# Altium PCB PCB_moteur.PcbDoc
Units mm, origin at the board's own origin, x right, y up, seen from the top; angles counter-clockwise.
Board outline 55 x 50 mm, 4 copper layers (Top Layer, Mid Layer 1, Mid Layer 2, Bottom Layer), stack 1.65 mm thick; 14 components, 2 nets, 38 pads, 38 vias.
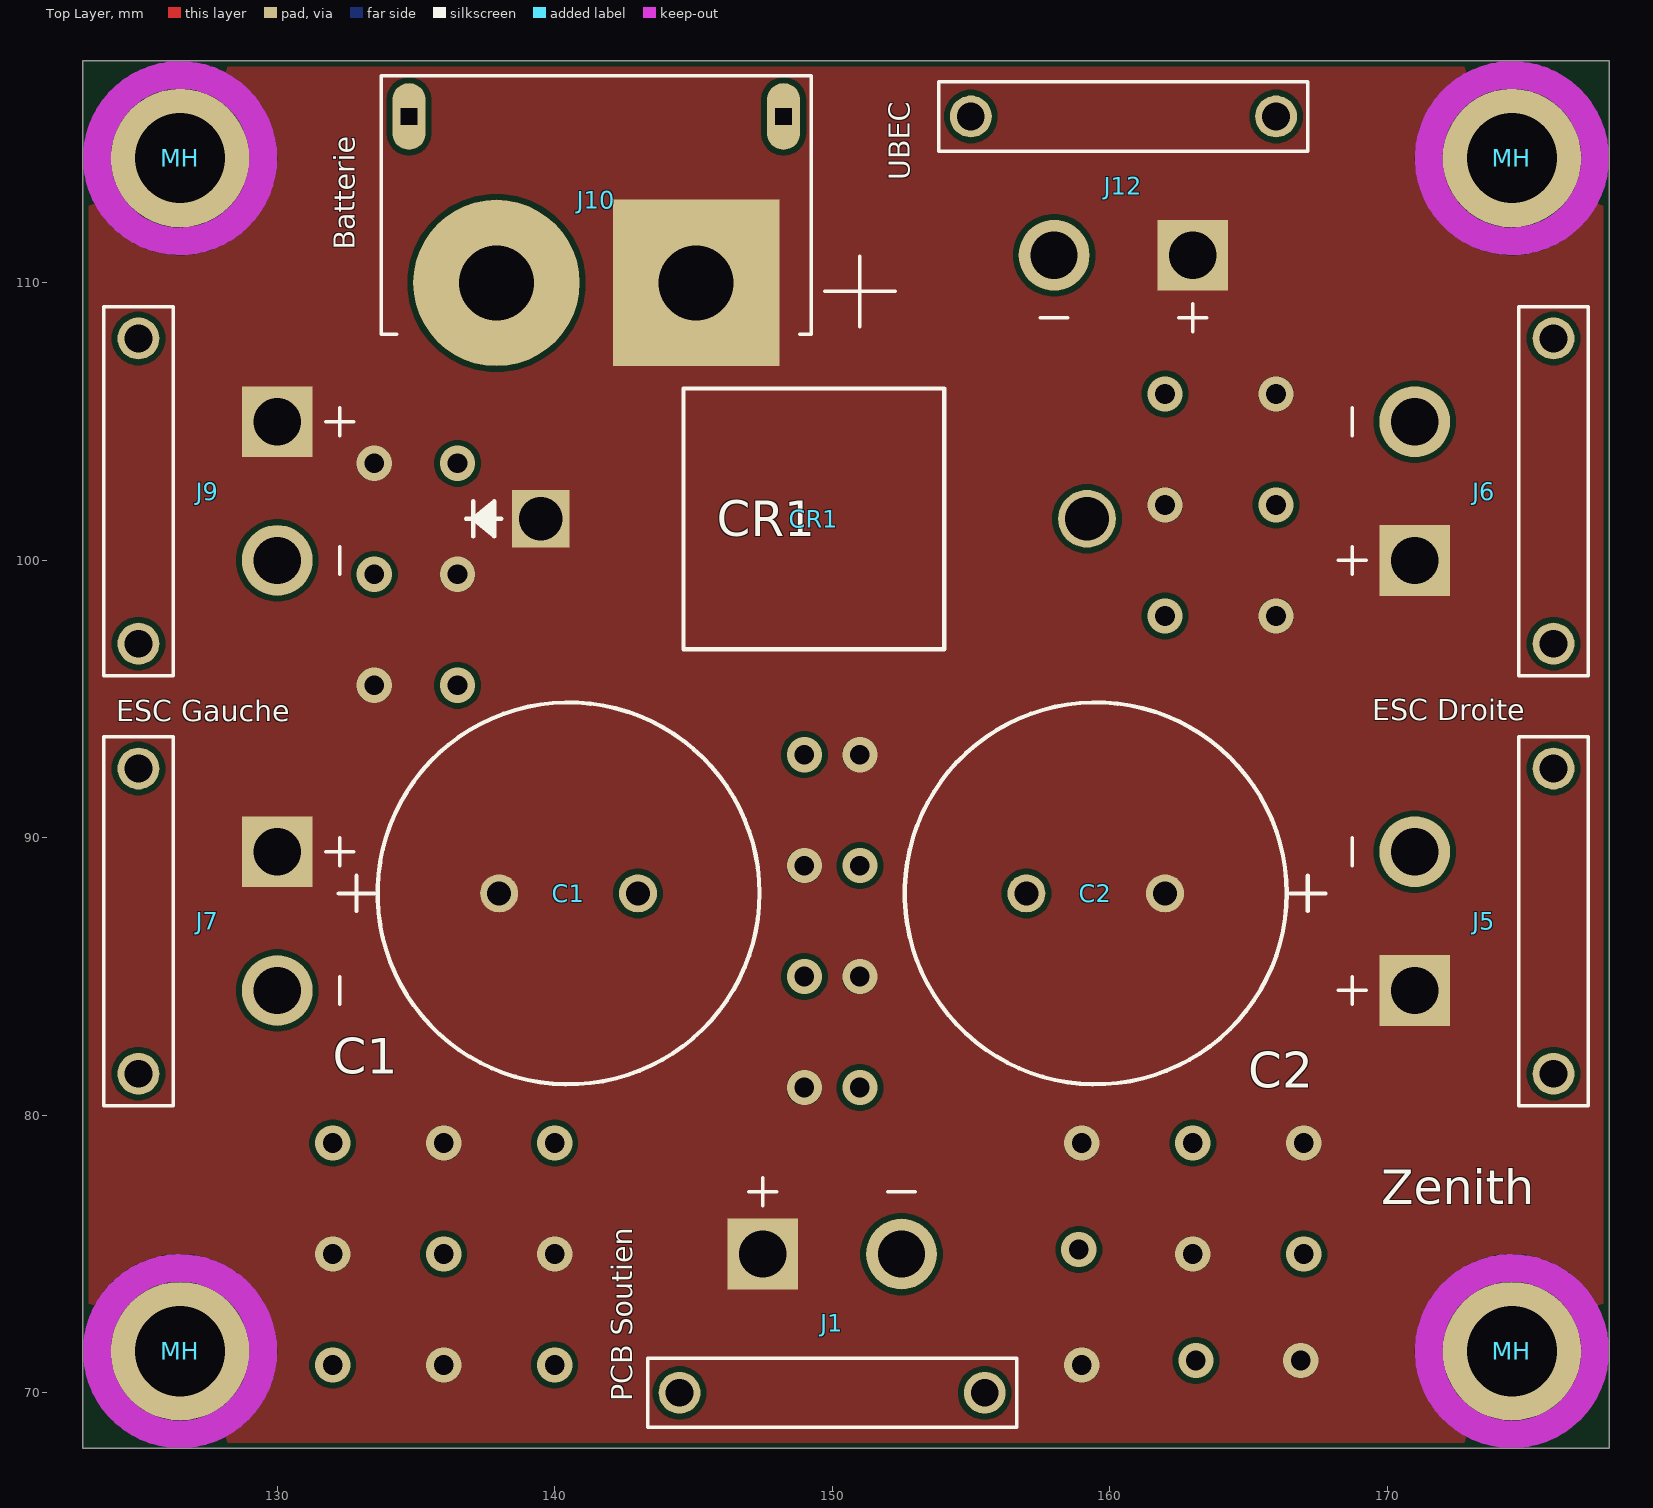
[diagram p0: Top Layer view]
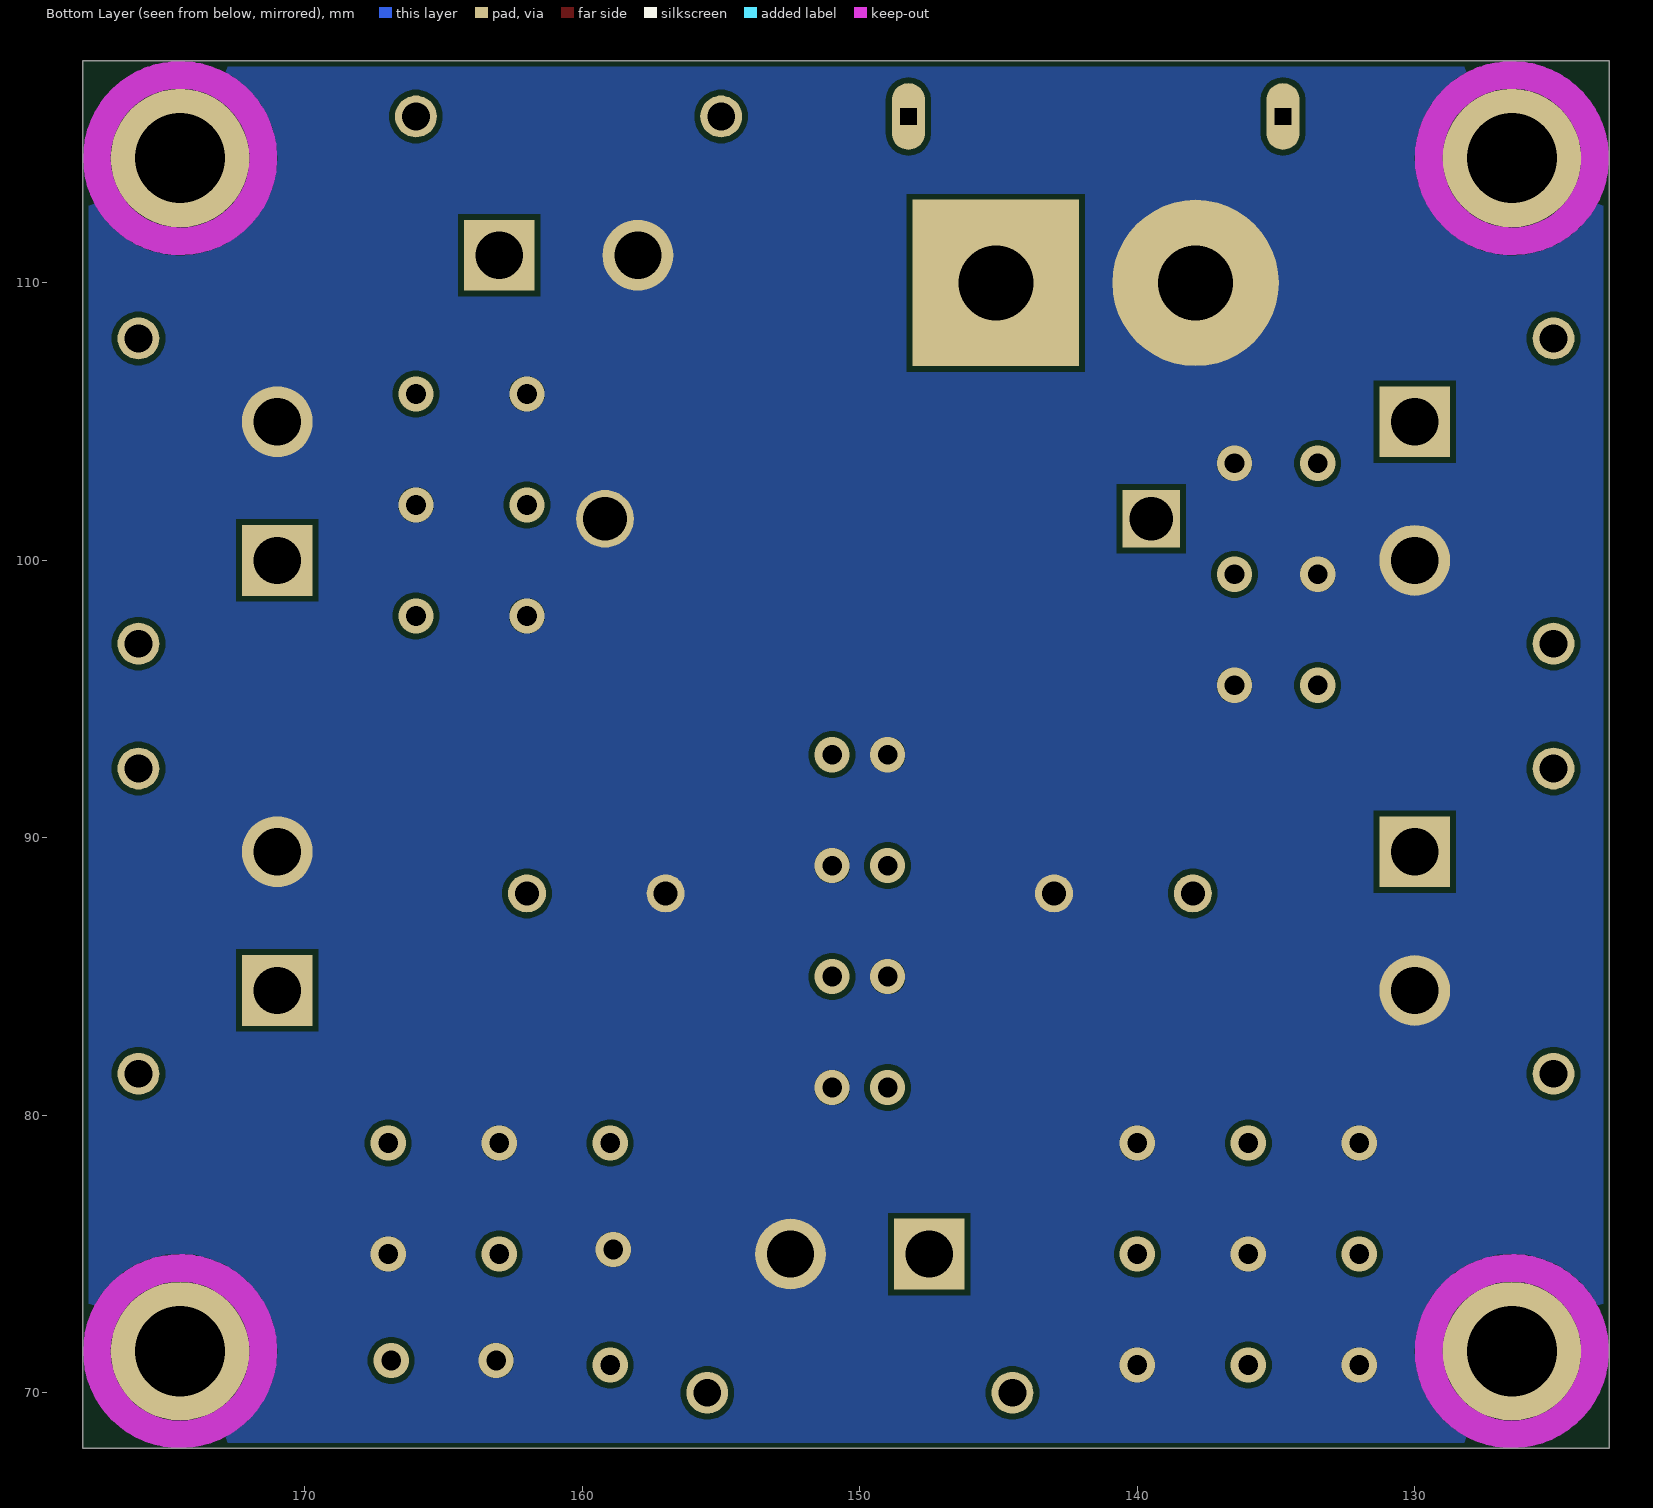
[diagram p1: Bottom Layer view, seen from below]
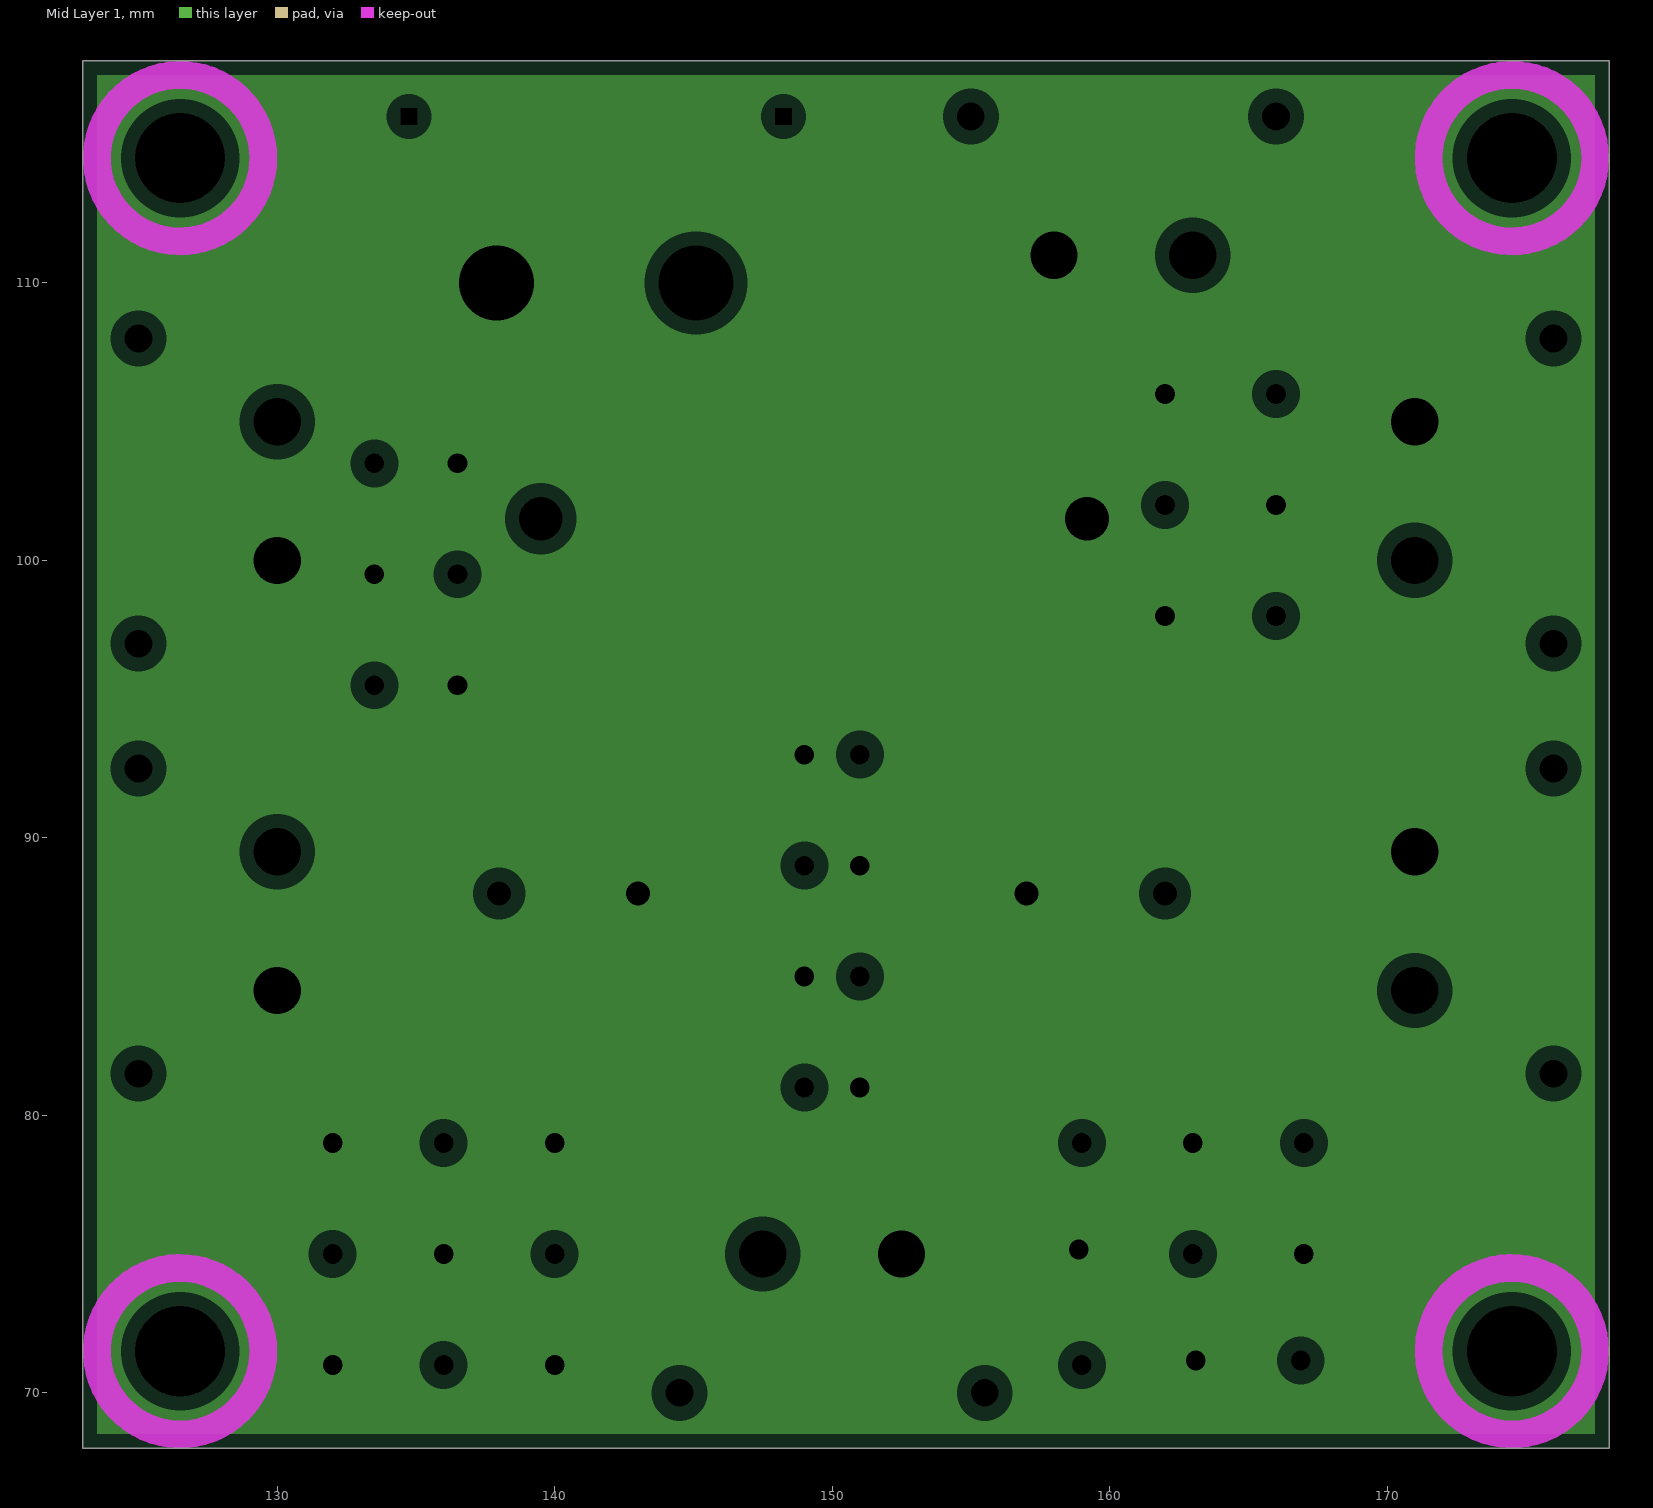
[diagram p2: Mid Layer 1, clearances drawn from the general rule]
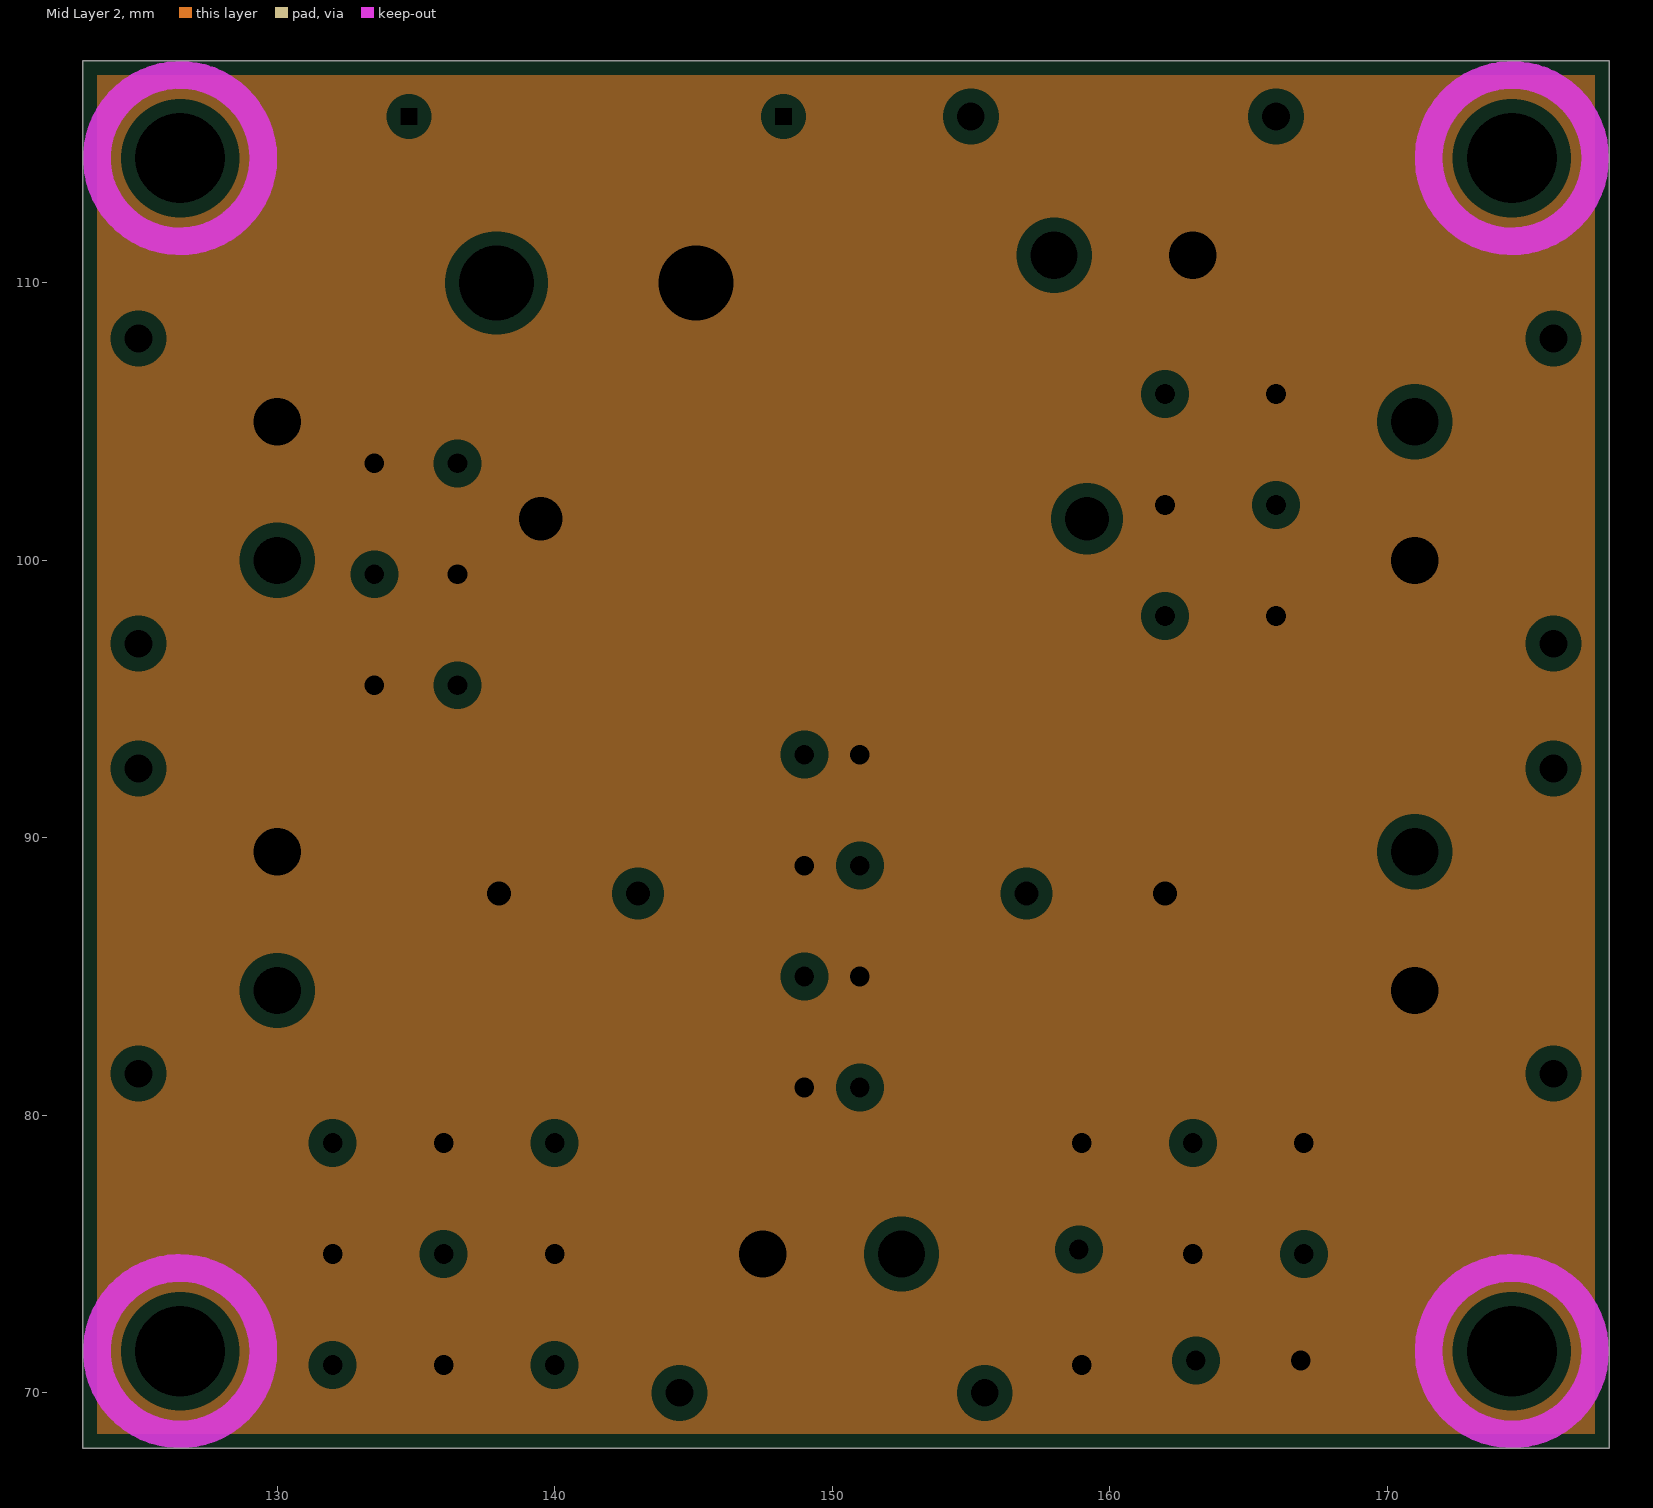
[diagram p3: Mid Layer 2, clearances drawn from the general rule]
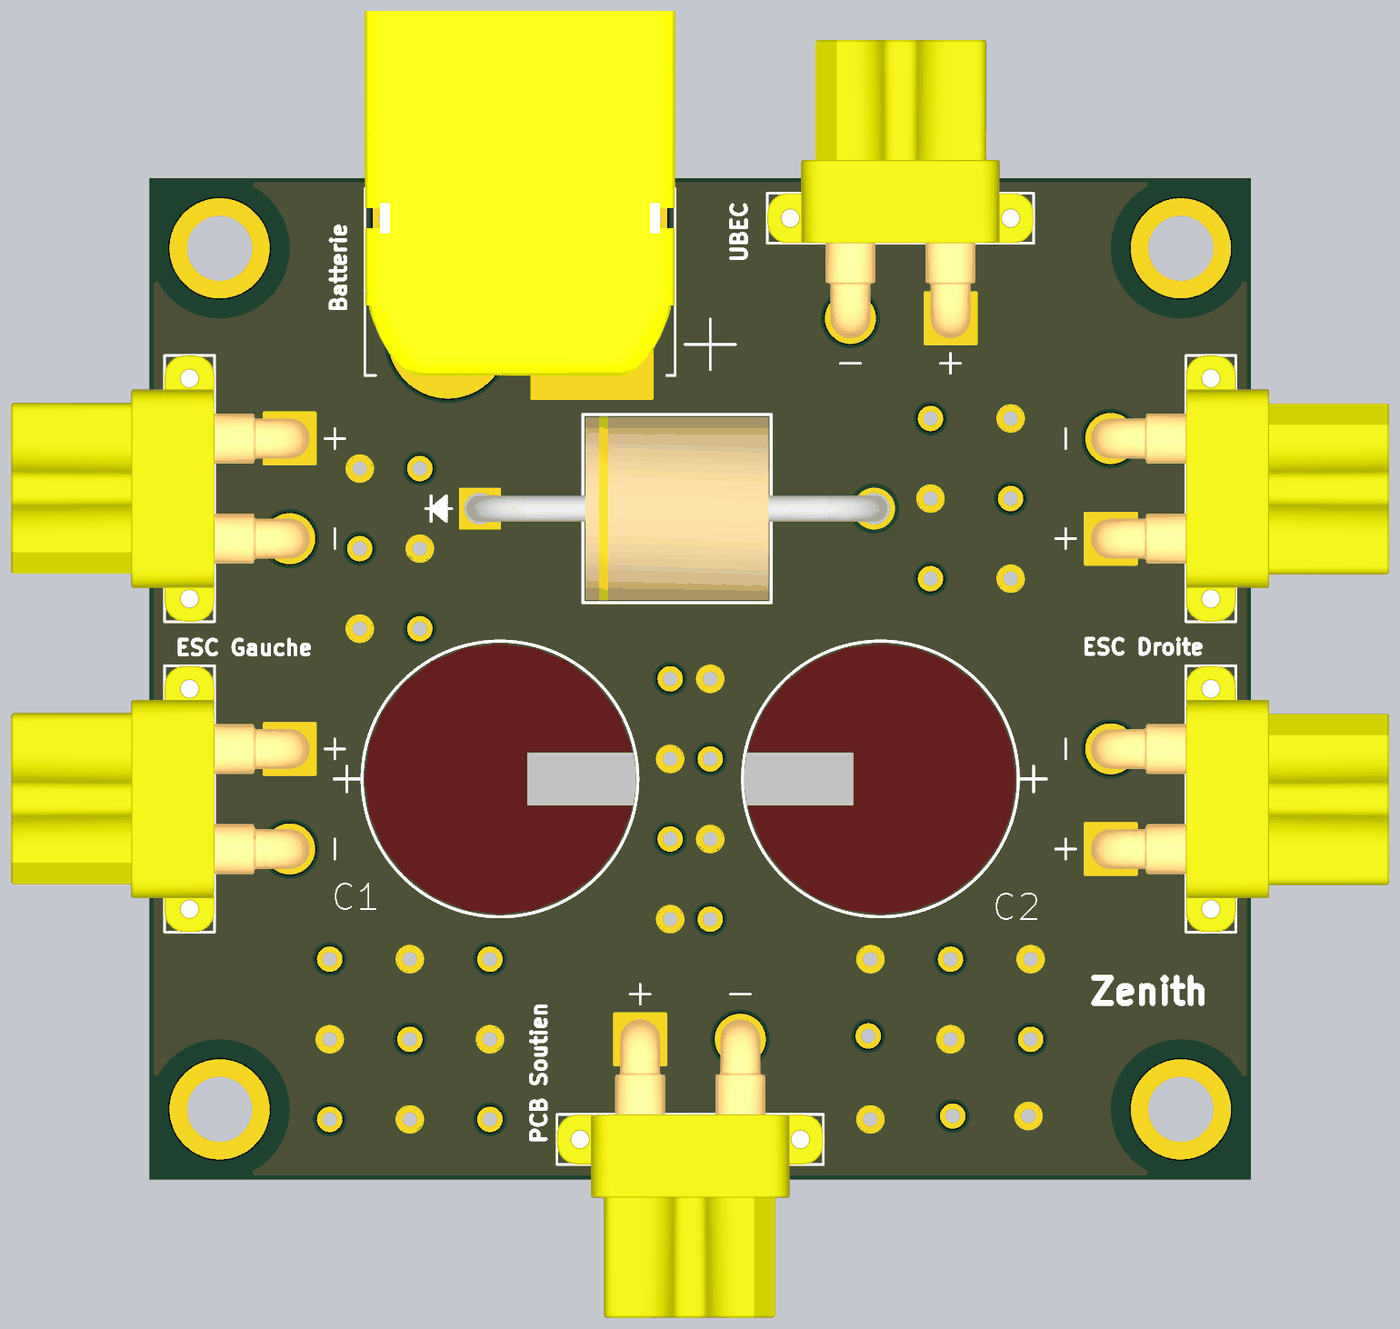
[diagram p4: 3D render of the assembled board from above, using the file's embedded part models]

## Layer stack, top to bottom
Top Solder: solder mask 0.0127, Solder Resist, Dk 3.8
Top Layer: signal copper 0.075
Dielectric 1: prepreg 0.1, 2313, Dk 4.05
Mid Layer 1: plane copper 0.0175, net GND
Core: core 1.265, FR-4, Dk 4.5
Mid Layer 2: plane copper 0.0175, net NetC1_1
Dielectric 2: prepreg 0.1, 2313, Dk 4.05
Bottom Layer: signal copper 0.075
Bottom Solder: solder mask 0.0127, Solder Resist, Dk 3.8

## Board outline
123,68 178,68 178,118 123,118

## Design rules (kind name [scope] priority, off if disabled: settings)
BoardOutlineClearance [All] p1: gap=0.2 ignorepadtopadclearanceinfootprint=FALSE
Clearance ClearanceMidLayer1 [OnLayer('Mid Layer 1') Or IsVia Or IsThruPin vs OnLayer('Mid Layer 1')] p1: gap=0.102 ignorepadtopadclearanceinfootprint=FALSE except(0.127: Arc-Via Track-Via SMDPad-Via THPad-Via Via-Via Via-Fill Via-Poly Via-Region Via-Text; 0.25: Arc-Hole Track-Hole SMDPad-Hole THPad-Hole Via-Hole Fill-Hole Poly-Hole Region-Hole Text-Hole)
Clearance ClearanceTopLayer [OnLayer('Top Layer') Or IsVia Or IsThruPin vs OnLayer('Top Layer') Or IsVia Or IsThruPin] p2: gap=0.203 ignorepadtopadclearanceinfootprint=FALSE except(0.25: Arc-Hole Track-Hole SMDPad-Hole THPad-Hole Via-Hole Fill-Hole Poly-Hole Region-Hole Text-Hole)
Clearance ClearanceBottomLayer [OnLayer('Bottom Layer') Or IsVia Or IsThruPin vs OnLayer('Bottom Layer') Or IsVia Or IsThruPin] p3: gap=0.203 ignorepadtopadclearanceinfootprint=FALSE except(0.25: Arc-Hole Track-Hole SMDPad-Hole THPad-Hole Via-Hole Fill-Hole Poly-Hole Region-Hole Text-Hole)
Clearance ClearanceMidLayer2 [OnLayer('Mid Layer 2') Or IsVia Or IsThruPin vs OnLayer('Mid Layer 2')] p4: gap=0.102 ignorepadtopadclearanceinfootprint=FALSE except(0.127: Arc-Via Track-Via SMDPad-Via THPad-Via Via-Via Via-Fill Via-Poly Via-Region Via-Text; 0.25: Arc-Hole Track-Hole SMDPad-Hole THPad-Hole Via-Hole Fill-Hole Poly-Hole Region-Hole Text-Hole)
ComponentClearance [All] p1: gap=0.102 collisioncheckmode=3 verticalgap=0.102 showdistances=TRUE
DiffPairsRouting [All] p1: maxlimit=0.203 minlimit=0.203 mostfreqgap=0.203 toplayer_minwidth=0.203 toplayer_maxwidth=1816.048 toplayer_prefwidth=0.203 bottomlayer_minwidth=0.203 bottomlayer_maxwidth=1816.048 bottomlayer_prefwidth=0.203 maxuncoupledlength=12.7
Height [All] p1: minheight=0 maxheight=1816.048 prefheight=12.7
HoleSize [All] p1: absolutevalues=TRUE maxlimit=6.3 minlimit=0.2 maxpercent=80.000 minpercent=20.000
HoleToHoleClearance [All] p1: gap=0.25 allowstackedmicrovias=FALSE
MinimumAnnularRing [All] p1: minimumring=0.076
MinimumSolderMaskSliver [All] p1: minsoldermaskwidth=0
PlaneClearance PlaneClearanceMidLayer1 [OnLayer('Mid Layer 1')] p1: clearance=0.102
PlaneClearance PlaneClearanceMidLayer2 [OnLayer('Mid Layer 2')] p2: clearance=0.102
PlaneClearance PlaneClearanceTopLayer [OnLayer('Top Layer')] p3: clearance=0.203
PlaneClearance PlaneClearanceBottomLayer [OnLayer('Bottom Layer')] p4: clearance=0.203
PlaneConnect PlaneConnectPowerPads [InPadClass('PowerPads')] p1: planeconnectstyle=Direct reliefexpansion=0.508 reliefentries=4 reliefconductorwidth=0.254 reliefairgap=0.254
PlaneConnect PlaneConnectTopLayer [OnLayer('Top Layer')] p2: pad.planeconnectstyle=Relief pad.reliefexpansion=0.3 pad.reliefentries=4 pad.reliefconductorwidth=0.203 pad.reliefairgap=0.203 via.planeconnectstyle=Direct via.reliefexpansion=0.3 via.reliefentries=4 via.reliefconductorwidth=0.127 via.reliefairgap=0.127
PlaneConnect PlaneConnectBottomLayer [OnLayer('Bottom Layer')] p3: pad.planeconnectstyle=Relief pad.reliefexpansion=0.3 pad.reliefentries=4 pad.reliefconductorwidth=0.203 pad.reliefairgap=0.203 via.planeconnectstyle=Direct via.reliefexpansion=0.3 via.reliefentries=4 via.reliefconductorwidth=0.127 via.reliefairgap=0.127
PlaneConnect PlaneConnectMidLayer1 [OnLayer('Mid Layer 1')] p4: pad.planeconnectstyle=Relief pad.reliefexpansion=0.3 pad.reliefentries=4 pad.reliefconductorwidth=0.102 pad.reliefairgap=0.102 via.planeconnectstyle=Direct via.reliefexpansion=0.3 via.reliefentries=4 via.reliefconductorwidth=0.127 via.reliefairgap=0.127
PlaneConnect PlaneConnectMidLayer2 [OnLayer('Mid Layer 2')] p5: pad.planeconnectstyle=Relief pad.reliefexpansion=0.3 pad.reliefentries=4 pad.reliefconductorwidth=0.102 pad.reliefairgap=0.102 via.planeconnectstyle=Direct via.reliefexpansion=0.3 via.reliefentries=4 via.reliefconductorwidth=0.127 via.reliefairgap=0.127
PolygonConnect PolygonConnectPowerPads [All vs (InPadClass('PowerPads'))] p1: connectstyle=Direct reliefconductorwidth=0.254 reliefentries=4 polygonreliefangle="90 Angle" airgapwidth=0.254
PolygonConnect PolygonConnectMidLayer1 [OnLayer('Mid Layer 1') vs OnLayer('Mid Layer 1')] p2: thpad.connectstyle=Relief thpad.reliefconductorwidth=0.102 thpad.reliefentries=4 thpad.polygonreliefangle="90 Angle" thpad.airgapwidth=0.102 smdpad.connectstyle=Relief smdpad.reliefconductorwidth=0.102 smdpad.reliefentries=4 smdpad.polygonreliefangle="90 Angle" smdpad.airgapwidth=0.102 via.connectstyle=Direct via.reliefconductorwidth=0.127 via.reliefentries=4 via.polygonreliefangle="90 Angle" via.airgapwidth=0.127
PolygonConnect PolygonConnectMidLayer2 [OnLayer('Mid Layer 2') vs OnLayer('Mid Layer 2')] p3: thpad.connectstyle=Relief thpad.reliefconductorwidth=0.102 thpad.reliefentries=4 thpad.polygonreliefangle="90 Angle" thpad.airgapwidth=0.102 smdpad.connectstyle=Relief smdpad.reliefconductorwidth=0.102 smdpad.reliefentries=4 smdpad.polygonreliefangle="90 Angle" smdpad.airgapwidth=0.102 via.connectstyle=Direct via.reliefconductorwidth=0.127 via.reliefentries=4 via.polygonreliefangle="90 Angle" via.airgapwidth=0.127
PolygonConnect PolygonConnectTopLayer [OnLayer('Top Layer') vs OnLayer('Top Layer')] p4: thpad.connectstyle=Relief thpad.reliefconductorwidth=0.203 thpad.reliefentries=4 thpad.polygonreliefangle="90 Angle" thpad.airgapwidth=0.203 smdpad.connectstyle=Relief smdpad.reliefconductorwidth=0.203 smdpad.reliefentries=4 smdpad.polygonreliefangle="90 Angle" smdpad.airgapwidth=0.203 via.connectstyle=Direct via.reliefconductorwidth=0.127 via.reliefentries=4 via.polygonreliefangle="90 Angle" via.airgapwidth=0.127
PolygonConnect PolygonConnectBottomLayer [OnLayer('Bottom Layer') vs OnLayer('Bottom Layer')] p5: thpad.connectstyle=Relief thpad.reliefconductorwidth=0.203 thpad.reliefentries=4 thpad.polygonreliefangle="90 Angle" thpad.airgapwidth=0.203 smdpad.connectstyle=Relief smdpad.reliefconductorwidth=0.203 smdpad.reliefentries=4 smdpad.polygonreliefangle="90 Angle" smdpad.airgapwidth=0.203 via.connectstyle=Direct via.reliefconductorwidth=0.127 via.reliefentries=4 via.polygonreliefangle="90 Angle" via.airgapwidth=0.127
RoutingVias [All] p1: holewidth=0.2 width=0.45 viastyle="Through Hole" minholewidth=0.2 minwidth=0.45 maxholewidth=6.3 maxwidth=6.55
SilkToSilkClearance [All] p1: silktosilkclearance=0
SilkToSolderMaskClearance [IsPad] p1: minsilkscreentomaskgap=0.102 clearancetoexposedcopper=TRUE
SolderMaskExpansion [All] p1: expansion=0.075 istentingtop=FALSE
Width [All] p1: maxlimit=1816.048 minlimit=0.203 preferedwidth=0.203 minimp=50.000000 maximp=50.000000 favimp=50.000000
20 further rules are at their usual default settings.

## Classes and differential pairs
pad class PowerPads: C1-1 C1-2 C2-1 C2-2 CR1-1 CR1-2 J1-N J1-P J1-S1 J1-S2 J5-N J5-P J5-S1 J5-S2 J6-N J6-P J6-S1 J6-S2 J7-N J7-P J7-S1 J7-S2 J9-N J9-P J9-S1 J9-S2 J10-1 J10-2 J10-S1 J10-S2 J12-N J12-P J12-S1 J12-S2 MH-MH
component class SCHEM_MOTEUR_PDB_OFA: C1 C2 CR1 J1 J5 J6 J7 J9 J10 J12

## Components (designator, comment, footprint, x,y, rotation, side; value= is the part's Value field where it differs from the comment)
C1 "1000uF 35V" CAP_RX_12P5X25_RUB 138,88 r0 top
C2 "1000uF 35V" CAP_RX_12P5X25_RUB 162,88 r180 top
CR1 "5KP30A" DIODE_P600_VIS 139.5,101.5 r0 top
J1 "XT30PW-F" AMASS_XT30PW-F 150,70 r180 top
J5 "XT30PW-F" AMASS_XT30PW-F 176,87 r270 top
J6 "XT30PW-F" AMASS_XT30PW-F 176,102.5 r270 top
J7 "XT30PW-F" AMASS_XT30PW-F 125,87 r90 top
J9 "XT30PW-F" AMASS_XT30PW-F 125,102.5 r90 top
J10 "XT60PW-M" AMASS_XT60PW-M 141.5,116 r0 top
J12 "XT30PW-F" AMASS_XT30PW-F 160.5,116 r0 top
MH "Comment" "MH - Footprint" 174.5,71.5 r0 top
MH "Comment" "MH - Footprint" 126.5,71.5 r0 top
MH "Comment" "MH - Footprint" 126.5,114.5 r0 top
MH "Comment" "MH - Footprint" 174.5,114.5 r0 top

## Footprints (in the part's own frame and the unit in brackets; to place one, negate y for a bottom-side part, rotate by r counter-clockwise, add the part's x,y. Pads: shape width x height; smd on the part's side, far side on the other; paste and mask are expansions set on the pad)
AMASS_XT30PW-F [mm]
  round 2.55 hole 1.7: N(-2.5,-5)
  rect 2.55x2.55 / inner round 2.55 / far side rect 2.55x2.55 hole 1.7: P(2.5,-5)
  round 1.508 hole 1: S1(5.5,0) S2(-5.5,0)
  silkscreen extent -6.65,-7.75 6.65,1.25, body extent -6.65,-6 6.65,8.9, height 5
AMASS_XT60PW-M [mm]
  rect 6x6 hole 2.7: 1(3.6,-6)
  round 6 hole 2.7: 2(-3.6,-6)
  oval 1.2x2.4 hole 0.6 square: S1(6.75,0) S2(-6.75,0)
  silkscreen extent -7.75,-7.85 10.77,1.48, body extent -7.75,-7.85 7.75,10.35, height 8.4
CAP_RX_12P5X25_RUB [mil]
  round 54 hole 34 paste-99999 mask+0: 1(0,0) 2(196.85,0)
  silkscreen extent -228,-271 369,271, body extent -168,-266 365,266, height 1064
DIODE_P600_VIS [mil]
  rect 82x82 hole 62 paste-99999 mask+0: 1(0,0)
  round 82 hole 62 paste-99999 mask+0: 2(775,0)
  silkscreen extent -106,-185 572,185, body extent -26,-180 801,180, height 360
"MH - Footprint" [mm]
  round 5 hole 3.25: MH(0,0)
  Keep-Out Layer circle w1: c0,0 r3

## Part data
C1 C2: library part 35RX301000M12.5X25, Manufacturer_Name=Rubycon, Copyright="Copyright (C) 2026 Ultra Librarian. All rights reserved.", Manufacturer_Part_Number=35RX301000M12.5X25
CR1: "Description", Manufacturer_Name=Vishay, Copyright="Copyright (C) 2026 Ultra Librarian. All rights reserved.", Manufacturer_Part_Number=5KP30A
J1 J5 J6 J7 J9 J12: "Socket; DC supply; XT30; female; PIN: 2; on PCBs; THT; yellow; 15A", Package=None, Check_prices=https://www.snapeda.com/parts/XT30PW-F/AMASS/view-part/?ref=eda, MF=amass, MP=XT30PW-F, SnapEDA_Link=https://www.snapeda.com/parts/XT30PW-F/AMASS/view-part/?ref=snap
J10: "Socket, DC supply, male, PIN: 2", Package=Package, Availability="Not in stock", Check_prices=https://www.snapeda.com/parts/XT60PW-M/AMASS/view-part/?ref=eda, MF=AMASS, MP=XT60PW-M, Price=None, SnapEDA_Link=https://www.snapeda.com/parts/XT60PW-M/AMASS/view-part/?ref=snap

## Via types
v1: diameter 1.27, hole 0.711, Top Layer to Bottom Layer, 38 vias

## Nets (pads, with @x,y where several pads share a name; then routed paths per layer and width w, separated by ;. In a path a pad name is that pad's centre, name@x,y a point inside that pad or via, vN(x,y) a via of type N, cw(c..) or ccw(c..) an arc to the next point about the centre after c; other vN are vias at no path point)
GND: C1.2 C2.2 CR1.2 J1.N J5.N J6.N J7.N J9.N J10.2 J12.N
  other v1: 132,71 140,71 163.11,71.165 136,75 167,75 158.89,75.165 132,79 140,79 163,79 151,81 149,85 151,89 149,93 136.5,95.5 162,98 133.5,99.5 166,102 136.5,103.5 162,106
NetC1_1: C1.1 C2.1 CR1.1 J1.P J5.P J6.P J7.P J9.P J10.1 J12.P
  other v1: 136,71 159,71 166.89,71.165 132,75 140,75 163,75 136,79 159,79 167,79 149,81 151,85 149,89 151,93 133.5,95.5 166,98 136.5,99.5 162,102 133.5,103.5 166,106
pads on no net: J1.S1 J1.S2 J5.S1 J5.S2 J6.S1 J6.S2 J7.S1 J7.S2 J9.S1 J9.S2 J10.S1 J10.S2 J12.S1 J12.S2 MH.MH

## Polygon pours and split planes (outlines as drawn)
GND on Bottom Layer "GND_L04_P001" (solid, pour order 1): 123,68 178,68 178,118 123,118
NetC1_1 on Top Layer "NETC1_1_L01_P000" (solid, pour order 0): 123,68 178,68 178,118 123,118
NetC1_1 on Mid Layer 2 (split plane): 177.49,68.51 123.51,68.51 123.51,117.49 177.49,117.49
GND on Mid Layer 1 (split plane): 177.49,68.51 123.51,68.51 123.51,117.49 177.49,117.49

## Silkscreen, mask and mechanical layers (free items; w line width, h text height)
Top Overlay:
  text "UBEC" at 152.8,113.7 h0.75 r90
  text "Batterie" at 132.8,111.2 h0.75 r90
  text "ESC Droite" at 169.464,94.236 h0.75
  text "ESC Gauche" at 124.2,94.2 h0.75
  text "Zenith" at 169.8,76.8 h1.25
  text "PCB Soutien" at 142.8,69.7 h0.75 r90